# Altium PCB speedometer_PCB_layout.PcbDoc
Units mm, origin at the board's own origin, x right, y up, seen from the top; angles counter-clockwise.
Board outline 95 x 60 mm, 2 copper layers (Top Layer, Bottom Layer); 10 components, 20 nets, 88 pads, 2 vias.
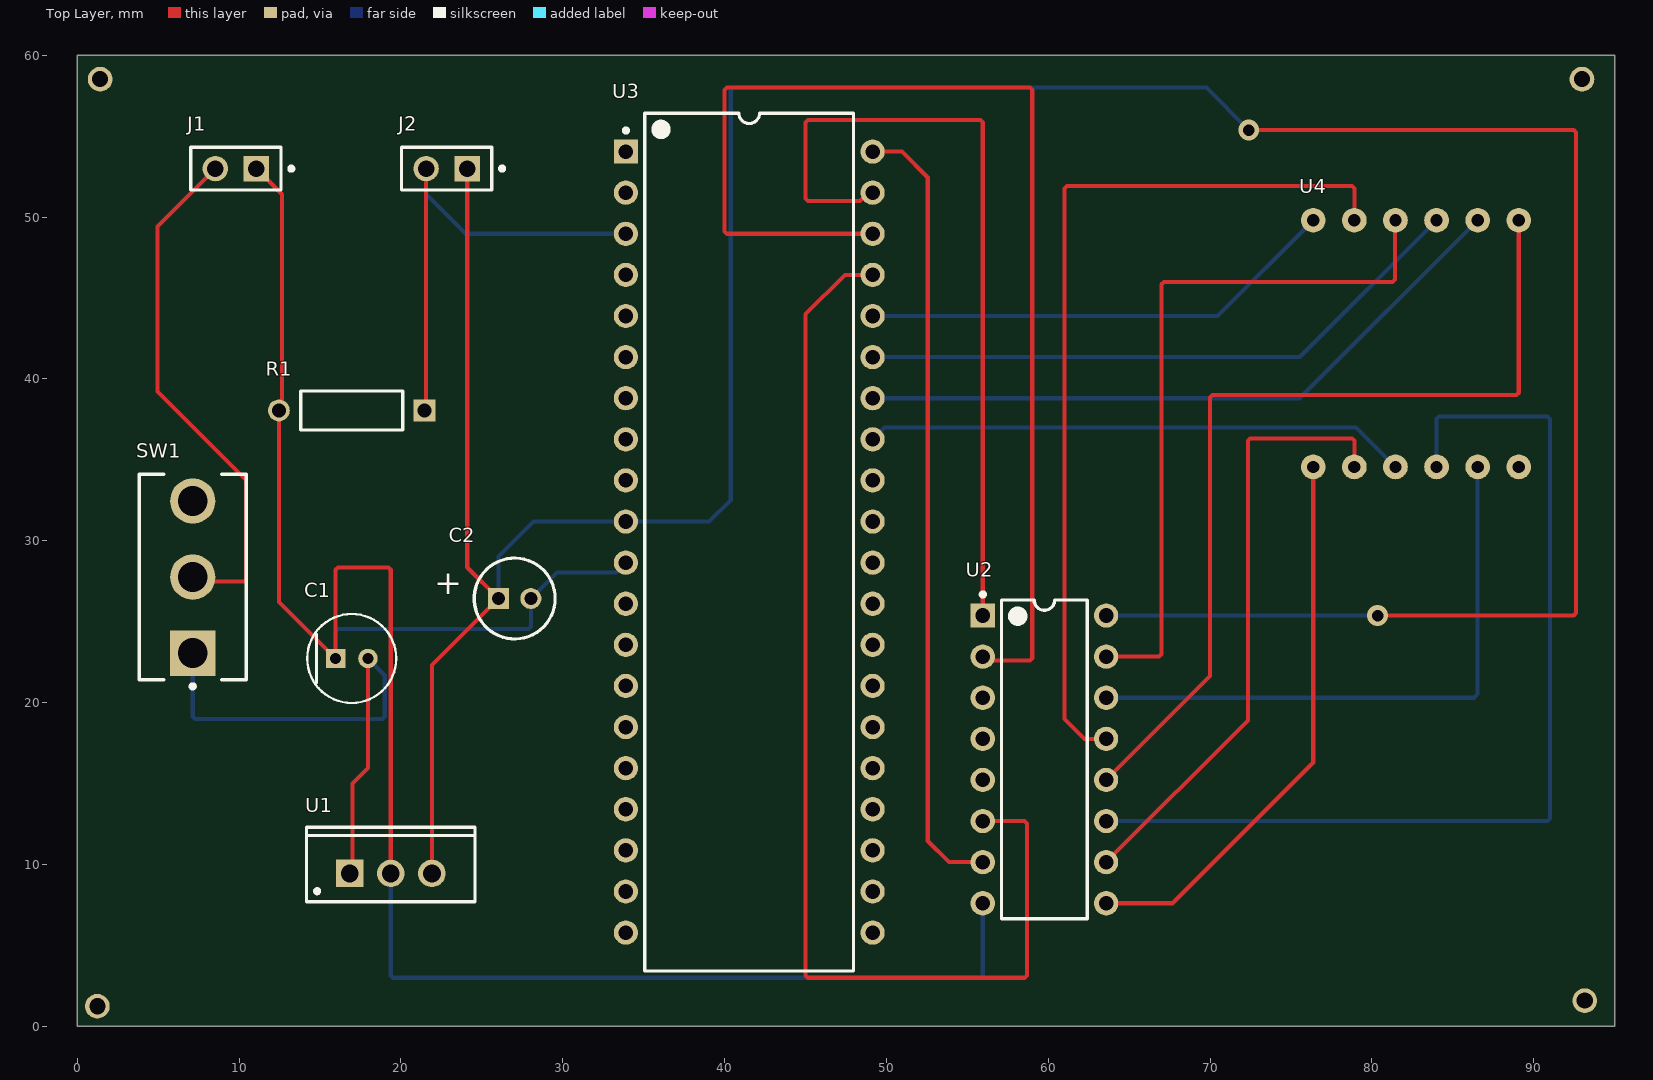
[diagram p0: Top Layer view]
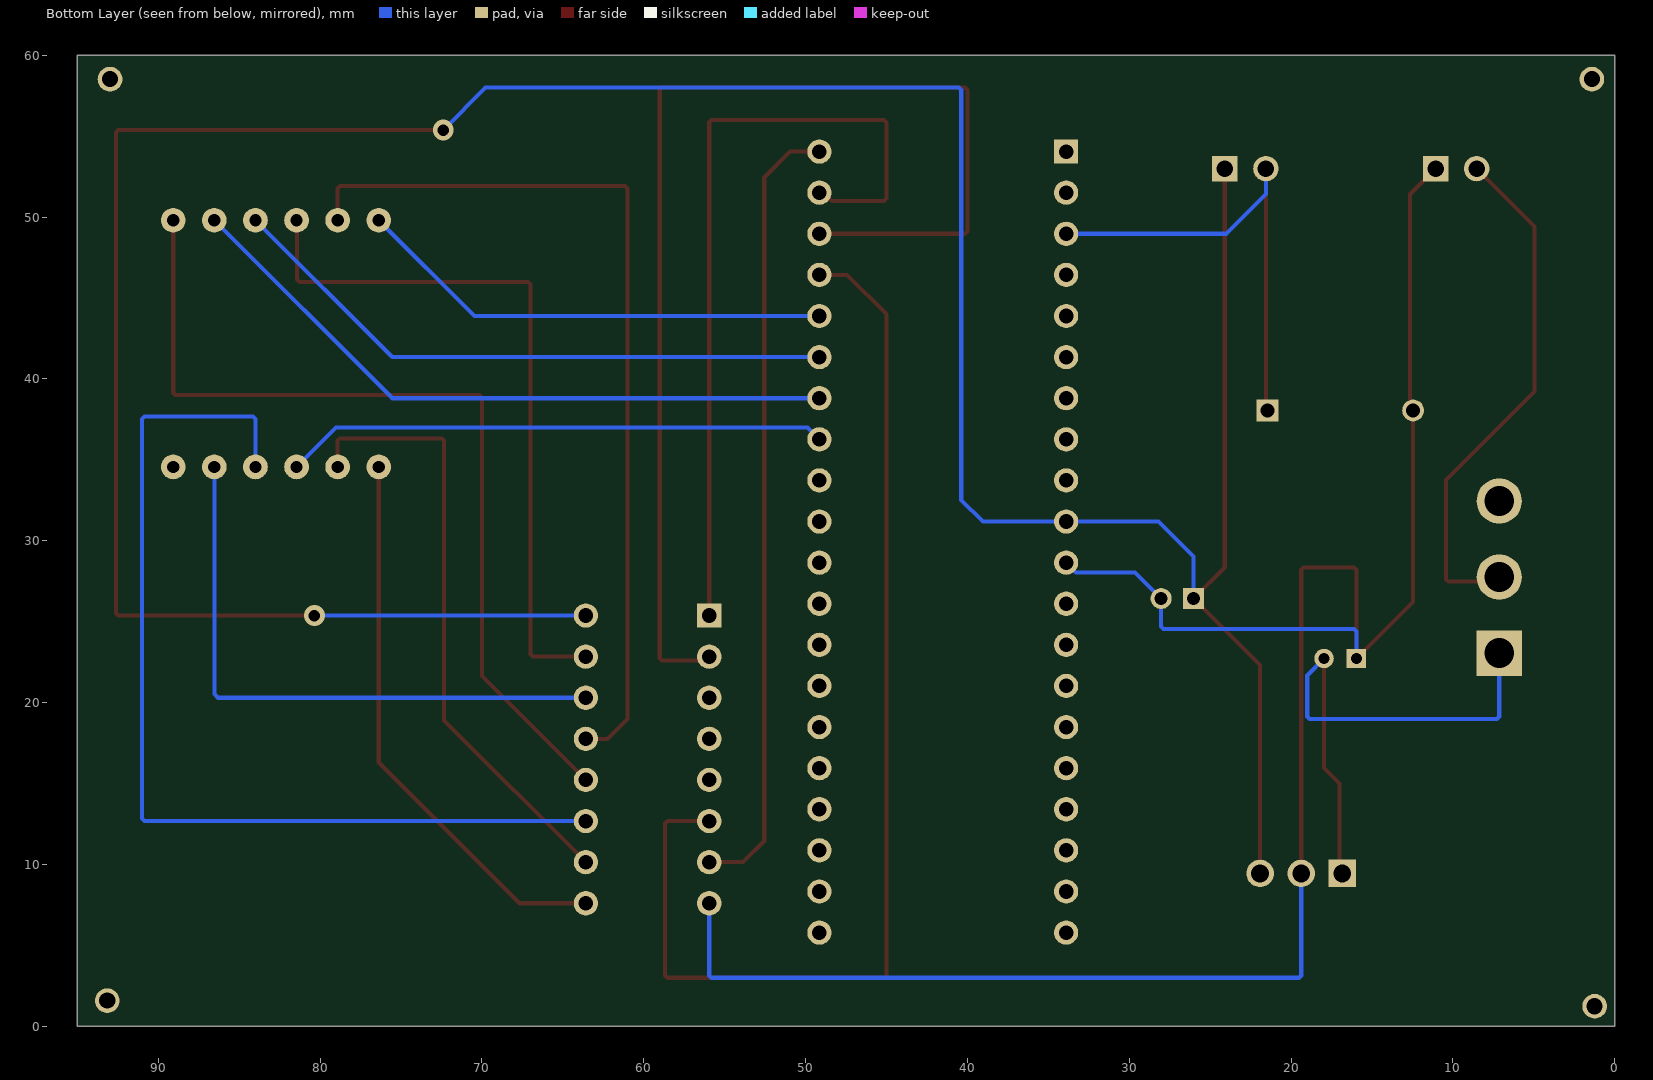
[diagram p1: Bottom Layer view, seen from below]

## Layer stack, top to bottom
Top Solder: solder mask 0.0102, Solder Resist, Dk 3.5
Top Layer: signal copper 0.0356
Dielectric 1: dielectric 0.32, FR-4, Dk 4.8
Bottom Layer: signal copper 0.0356
Bottom Solder: solder mask 0.0102, Solder Resist, Dk 3.5

## Board outline
0,0 95,0 95,60 0,60

## Design rules (kind name [scope] priority, off if disabled: settings)
Clearance [All] p1: gap=0.254 ignorepadtopadclearanceinfootprint=FALSE except(0: Arc-Hole Track-Hole SMDPad-Hole THPad-Hole Via-Hole Fill-Hole Poly-Hole Region-Hole Text-Hole)
PolygonConnect [All] p1: connectstyle=Relief reliefconductorwidth=0.254 reliefentries=4 polygonreliefangle="90 Angle" airgapwidth=0.254
RoutingVias [All] p1: holewidth=0.711 width=1.27 viastyle="Through Hole" minholewidth=0.711 minwidth=1.27 maxholewidth=0.711 maxwidth=1.27
SolderMaskExpansion [All] p1: expansion=0.102 istentingtop=FALSE
Width [All] p1: maxlimit=0.254 minlimit=0.254 preferedwidth=0.254
30 further rules are at their usual default settings.

## Components (designator, comment, footprint, x,y, rotation, side; value= is the part's Value field where it differs from the comment)
C1 "ECA2AM100" FP-RAD-TH-D_5_0_5-L_11_1-MFG 16.959,22.728 r0 top
C2 "1uF" CAPPR55-200-1100X500X1200 27.026,26.432 r0 top
J1 "M20-9990246" FP-M20-9990246-MFG 9.8,52.995 r180 top
J2 "M20-9990246" FP-M20-9990246-MFG 22.826,52.995 r180 top
R1 "MFR-25FBF52-1K" RESA60-630X240 16.959,38.053 r180 top
SW1 "1101M2S3CQE2" FP-1101M2S3CQE2-MFG 7.134,27.756 r90 top
U1 "L7805CV" TO220 19.371,9.447 r0 top
U2 "SN74LS47N" N0016A 59.762,16.492 r0 top
U3 "ATmega32A-PU" 40P6 41.521,29.92 r0 top
U4 "4-Digit 7SD" "4-Digit 7SD" 76.371,34.562 r0 top

## Footprints (in the part's own frame and the unit in brackets; to place one, negate y for a bottom-side part, rotate by r counter-clockwise, add the part's x,y. Pads: shape width x height; smd on the part's side, far side on the other; paste and mask are expansions set on the pad)
"4-Digit 7SD" [mil]
  round 60 hole 30: 1(0,0) 2(100,0) 3(200,0) 4(300,0) 5(400,0) 6(500,0) 7(500,600) 8(400,600) 9(300,600) 10(200,600) 11(100,600) 12(0,600)
40P6 [mm] "40-Pin Ceramic Dual In-Line Package (CerDIP)"
  rect 1.5x1.5 hole 0.9: 1(-7.62,24.13)
  round 1.5 hole 0.9: 2(-7.62,21.59) 3(-7.62,19.05) 4(-7.62,16.51) 5(-7.62,13.97) 6(-7.62,11.43) 7(-7.62,8.89) 8(-7.62,6.35) 9(-7.62,3.81) 10(-7.62,1.27) 11(-7.62,-1.27) 12(-7.62,-3.81) 13(-7.62,-6.35) 14(-7.62,-8.89) 15(-7.62,-11.43) 16(-7.62,-13.97) 17(-7.62,-16.51) 18(-7.62,-19.05) 19(-7.62,-21.59) 20(-7.62,-24.13) 21(7.62,-24.13) 22(7.62,-21.59) 23(7.62,-19.05) 24(7.62,-16.51) 25(7.62,-13.97) 26(7.62,-11.43) 27(7.62,-8.89) 28(7.62,-6.35) 29(7.62,-3.81) 30(7.62,-1.27) 31(7.62,1.27) 32(7.62,3.81) 33(7.62,6.35) 34(7.62,8.89) 35(7.62,11.43) 36(7.62,13.97) 37(7.62,16.51) 38(7.62,19.05) 39(7.62,21.59) 40(7.62,24.13)
  silkscreen extent -7.74,-26.5 6.45,26.5, body extent -7.05,-26.47 7.05,26.47, height 5.72
CAPPR55-200-1100X500X1200 [mm] "THD, 2-Leads, Dia 5mm, Body Length 11mm"
  rect 1.3x1.3 hole 0.8: 1(-1,0)
  round 1.3 hole 0.8: 2(1,0)
  silkscreen extent -2.5,-2.5 2.5,2.5, body extent -2.5,-2.5 2.5,2.5, height 12
FP-1101M2S3CQE2-MFG [mm]
  rect 2.8x2.8 hole 1.85 paste-1000 mask+0: 1(-4.7,0)
  round 2.8 hole 1.85 paste-1000 mask+0: 2(0,0) 3(4.7,0)
  silkscreen extent -6.87,-3.3 6.35,3.3, body extent -6.45,-3.4 6.45,3.4, height 0.25
FP-M20-9990246-MFG [mm]
  rect 1.57x1.57 hole 1.02 paste-1000 mask+0: 1(-1.27,0)
  round 1.57 hole 1.02 paste-1000 mask+0: 2(1.27,0)
  silkscreen extent -3.55,-1.32 2.79,1.32, body extent -2.89,-1.42 2.89,1.42, height 0.25
FP-RAD-TH-D_5_0_5-L_11_1-MFG [mm]
  rect 1.2x1.2 hole 0.7 paste-1000 mask+0: 1(-1,0)
  round 1.2 hole 0.7 paste-1000 mask+0: 2(1,0)
  silkscreen extent -2.75,-2.75 2.75,2.75, body extent -2.85,-2.85 2.85,2.85, height 0.25
N0016A [mm] "DIP, 16-Leads, Body 19.7x6.6mm, Pitch 2.54mm"
  rect 1.5x1.5 hole 0.9: 1(-3.81,8.89)
  round 1.5 hole 0.9: 2(-3.81,6.35) 3(-3.81,3.81) 4(-3.81,1.27) 5(-3.81,-1.27) 6(-3.81,-3.81) 7(-3.81,-6.35) 8(-3.81,-8.89) 9(3.81,-8.89) 10(3.81,-6.35) 11(3.81,-3.81) 12(3.81,-1.27) 13(3.81,1.27) 14(3.81,3.81) 15(3.81,6.35) 16(3.81,8.89)
  silkscreen extent -3.93,-9.85 2.65,10.31, body extent -3.95,-9.85 3.95,9.85, height 5.08
RESA60-630X240 [mm] "Axial Resistor, 2-Leads, Dia 2.4mm, Body Length 6.3mm"
  rect 1.35x1.35 hole 0.85: 1(-4.5,0)
  round 1.35 hole 0.85: 2(4.5,0)
  silkscreen extent -3.15,-1.2 3.15,1.2, body extent -3.15,-1.2 3.15,1.2, height 2.4
TO220 [mm] "TO, Thru-Hole, Vertical, Heatsink Mounted; 3 In-Line Leads; Pitch 2.54 mm"
  rect 1.7x1.7 hole 1.1: 1(-2.54,0)
  round 1.7 hole 1.1: 2(0,0) 3(2.54,0)
  silkscreen extent -5.2,-1.75 5.2,2.85, body extent -5.25,-1.8 5.25,2.9, height 19.7

## Part data
C1: library part CMP-05427-000869-1, "Aluminum Electrolytic Capacitors (Radial Lead Type) 10uF ±20% 100V", Capacitance=10uF, Case/Package=Radial, Dielectric Material=Aluminium, Leakage Current=3uA, Max Operating Temperature=85°C, Min Operating Temperature=-40°C, Package Quantity=200, Ripple Current=70mA, Tolerance=20%, Voltage=100V, Construction=RADIAL, Contact Plating=Tin, Diameter=5mm, Dissipation Factor=0.1%, Height=11mm, Height - Seated (Max)=0.472inch, Lead Diameter=0.5mm, Lead Free="Lead Free", Lead Pitch=2mm, Lead/Base Style=Straight, Length=11mm, Life (Hours)=2000Hour, Mount="Through Hole", Number of Pins=2, Packaging=Bulk, Polarity=Polar, Radiation Hardening=No, REACH SVHC="No SVHC", Ripple Current (AC)=70mA, RoHS Compliant=Yes, Series=M, Termination=Radial, Voltage Rating=100V, Voltage Rating (DC)=100V, Width=5mm
C2: library part CMP-1665-00039-1, "Aluminum Electrolytic Capacitor, 1 uF, +/- 20%, 50 V, -55 to 105 degC, 2-Pin THD, RoHS, Bulk", Max Operating Temperature="70 degC", Min Operating Temperature="-30 degC", Package Quantity=150, Channels=2, ComponentLink1Description="Manufacturer URL", ComponentLink1URL=http://www.panasonic.com/, ComponentLink2Description=Datasheet, ComponentLink2URL=https://datasheet.ciiva.com/7275/94060-7275472.pdf, DatasheetVersion=Mar-05, Mount="Through Hole", PackageDescription="2-Pin Radial Lead, Dia 5 mm, Body Length 11 mm", PackageReference=CAPPR55-200-1100X500X1200, Packaging=Bulk, Radiation Hardening=No, RoHSCompliant=true
J1 J2: library part CMP-15831-000009-1, "CONN HEADER VERT 2POS 2.54MM", Current Rating=3A, Manufacturer=Harwin, Temperature="-40°C to +105°C", Temperature Range High=+105°C, Temperature Range Low=-40°C, Automotive=No, Category=Conn, ComponentLink2Description=Datasheet, ComponentLink2URL=https://cdn.harwin.com/pdfs/M20-999.pdf, Conn Gender=Male, Conn Orientation=Vertical, Contact Material=Tin,Nickel, Device Class L1=Connectors, Device Class L2="Headers and Wire Housings", Device Class L3=unset, Digikey Description="CONN HEADER VERT 2POS 2.54MM", Height=8.99mm, Lead Free=Yes, Manufacturer Part Number=M20-9990246, Mouser Description="2.54mm (0.1\") Pitch SIL Vertical PC Tail Pin Header, 6.1mm mating pin height, tin, 2 contacts", Number Of Contacts=2, Number Of Rows=1, Octopart=https://octopart.com/m20-9990246-harwin-2590635, Package=M20-9990246, Pitch=2.54mm, RoHS=TRUE
R1: library part CMP-1659-00075-1, "Axial Resistor, 1 KOhm, +/- 1%, 250 mW, -55 to 155 degC, 2-Pin THD, RoHS, Bulk", Case\Package=Axial, Max Operating Temperature="155 degC", Min Operating Temperature="-55 degC", Package Quantity=200, Power Rating="250 mW", Resistance="10 kohm", Tolerance=1%, Voltage Rating="250 V", ComponentLink1Description="Manufacturer URL", ComponentLink1URL=http://www.yageo.com/, ComponentLink2Description=Datasheet, ComponentLink2URL=http://www.yageo.com/documents/recent/Yageo%20LR_MFR_2013.pdf, DatasheetVersion=Apr-13, Length="0.248 inch", PackageDescription="2-Pin Axial Lead, Dia 2.4 mm, Body Length 6.3 mm", PackageReference=MFR-25, Packaging=Bulk, RoHSCompliant=true
SW1: library part CMP-10038-000019-1, "SWITCH SLIDE SPDT 6A 120V", Actuator Color=Black, Contact Current Rating=6A, Contact Resistance=10mR, Flammability Rating="UL94 V-0", Insulation Resistance=1GR, Max Operating Temperature=65°C, Max Voltage Rating (AC)=250V, Max Voltage Rating (DC)=28V, Min Operating Temperature=-30°C, Package Quantity=1, Voltage Rating (AC)=120V, Actuator Length=5.08mm, Actuator Material=Nylon, Actuator Type=Standard, Approvals=UL, Body Material="Stainless Steel", Contact Material=Copper, Contact Plating=Silver, Current Rating=6A, Depth=6.6mm, Electrical Life=40000Cycles, Housing Material="Stainless Steel", Lead Free="Lead Free", Length=12.7mm, Max Current Rating=6A, Mount="Through Hole", Number of Poles=1, Number of Positions=3, Orientation=Vertical, Packaging=Bulk, REACH SVHC="No SVHC", Series=1000, Switch Function=On-On, Switch Travel=2.16mm, Termination="PC Pins", Throw Configuration=SPDT, Voltage Rating (DC)=28V
U1: library part CMP-0244-00483-1, "Positive Voltage Regulator, 5V, 3-Pin TO-220", ComponentLink1Description="Manufacturer URL", ComponentLink1URL=http://www.st.com, ComponentLink2Description=Datasheet, ComponentLink2URL=http://www.st.com/internet/com/TECHNICAL_RESOURCES/TECHNICAL_LITERATURE/DATASHEET/CD00000444.pdf, ComponentLink3Description="Package Specification", ComponentLink3URL=http://www.st.com/internet/com/TECHNICAL_RESOURCES/TECHNICAL_LITERATURE/PACKAGE_INFORMATION/CD00004649.pdf, DatasheetVersion=16/11/2011, PackageDescription="TO, Thru-Hole, Vertical, Heatsink Mounted; 3 In-Line Leads; Pitch 2.54 mm", PackageReference=TO220, PackageVersion=ver3.0
U2: library part CMP-0388-00303-2, "BCD-to-7-Segment Decoder / Driver, 4.75 to 5.25 V, 0 to 70 degC, 16-pin DIP (N16), Pb-Free (RoHS)", Manufacturer="Texas Instruments", Rating=Catalog, Code_JEDEC=MS-001, ComponentLink1Description="Manufacturer URL", ComponentLink1URL=http://www.ti.com/, ComponentLink2Description=Datasheet, ComponentLink2URL=http://www.ti.com/general/docs/lit/getliterature.tsp?genericPartNumber=SN74LS47&fileType=pdf, ComponentLink3Description="Package Specification", ComponentLink3URL=http://www.ti.com/litv/pdf/mpdi002c, DatasheetVersion=SDLS111, Eco-Plan="Pb-Free (RoHS)", Mounting Technology="Through Hole", PackageDescription="16-Pin Plastic In-Line, Body 19.305 x 6.35 mm, Pitch 2.54 mm", PackageReference=N0016A, PackageVersion=4040049/E, PartNumber=SN74LS47N, SubFamily="Discrete Segment LED Driver", Vin(Max)(V)=5.25, Vin(Min)(V)=4.75
U3: library part CMP-0095-00028-2, "8-bit AVR Microcontroller, 2.7-5.5V, 16MHz, 32KB Flash, 1KB EEPROM, 2KB SRAM, 40-pin PDIP, Industrial Grade (-40°C to 85°C)", Code_JEDEC=MS-011-AC, ComponentLink1Description="Manufacturer URL", ComponentLink1URL=http://www.atmel.com/, ComponentLink2Description="ATmega32A Datasheet", ComponentLink2URL=http://www.atmel.com/dyn/resources/prod_documents/doc8155.pdf, ComponentLink3Description="ATmega32A Summary", ComponentLink3URL=http://www.atmel.com/dyn/resources/prod_documents/8155S.pdf, DatasheetVersion="revC, Feb-2011", PackageDescription="40-lead (0.600\"/15.24mm Wide) Plastic Dual Inline Package (PDIP)", PackageReference=40P6, PackageVersion="revB, Sep-2001", RevisionNote="DatasheetVersion updated. URLs added."

## Free pads (board coordinates)
  round 1.524 hole 1: 2(1.411,58.525) 3(92.976,58.525) 4(93.147,1.586) 5(1.24,1.244)

## Via types
v1: diameter 1.27, hole 0.711, Top Layer to Bottom Layer, 2 vias

## Nets (pads, with @x,y where several pads share a name; then routed paths per layer and width w, separated by ;. In a path a pad name is that pad's centre, name@x,y a point inside that pad or via, vN(x,y) a via of type N, cw(c..) or ccw(c..) an arc to the next point about the centre after c; other vN are vias at no path point)
NetC1_1: C1.1 C2.2 J1.1 R1.2 U1.2 U2.8 U3.11 | length 130.1
  Top Layer w0.254: J1.1 12.651,51.414 12.651,38.246 R1.2 12.459,26.228 C1.1 15.959,28.21 16.107,28.358 19.222,28.358 19.371,28.21 U1.2
  Bottom Layer w0.254: C1.1 15.959,24.399 16.107,24.548 27.877,24.548 28.026,24.697 C2.2 29.636,28.042 33.293,28.042 U3.11 ; U1.2 19.371,3.149 19.52,3 55.803,3 55.952,3.149 U2.8
NetC1_2: C1.2 SW1.1 U1.1 | length 33.7
  Top Layer w0.254: U1.1 17,9.616 17,15 17.959,15.959 C1.2
  Bottom Layer w0.254: SW1.1 7.134,19.149 7.282,19 18.851,19 19,19.149 19,21.687 C1.2
NetC2_1: C2.1 J2.1 U1.3 U2.16 U3.10 | length 202
  Top Layer w0.254: U1.3 21.911,22.317 C2.1 24.096,28.362 J2.1 ; v1(72.382,55.382) 92.469,55.382 92.618,55.233 92.618,25.531 92.469,25.382 v1(80.343,25.382)
  Bottom Layer w0.254: C2.1 26.026,29.026 28.19,31.19 U3.10 ; U3.10@33.921,31.19 39.041,31.19 40.382,32.531 40.382,57.851 40.531,58 69.764,58 v1(72.382,55.382) ; U2.16 v1(80.343,25.382)
NetJ1_2: J1.2 SW1.2 | length 32.6
  Top Layer w0.254: SW1.2 7.417,27.473 10.269,27.473 10.418,27.622 10.418,33.767 4.952,39.233 4.952,49.418 J1.2
NetJ2_2: J2.2 R1.1 U3.3 | length 29.9
  Top Layer w0.254: R1.1 21.556,38.151 J2.2
  Bottom Layer w0.254: J2.2 21.556,51.42 24.006,48.97 U3.3
NetU2_1: U2.1 U3.39 | length 50.7
  Top Layer w0.254: U3.39 48.879,51.51 48.369,51 45.149,51 45,51.149 45,55.851 45.149,56 55.803,56 55.952,55.851 U2.1
NetU2_2: U2.2 U3.38 | length 75.4
  Top Layer w0.254: U3.38 40.149,48.97 40,49.119 40,57.851 40.149,58 58.863,58 59.012,57.851 59.012,22.745 58.863,22.596 56.724,22.596 56.716,22.604 56.19,22.604 U2.2
NetU2_6: U2.6 U3.37 | length 72
  Top Layer w0.254: U3.37 47.43,46.43 45,44 45,3.149 45.149,3 58.525,3 58.674,3.149 58.674,12.533 58.525,12.682 U2.6
NetU2_7: U2.7 U3.40 | length 49
  Top Layer w0.254: U3.40 50.95,54.05 52.553,52.447 52.553,11.447 53.858,10.142 U2.7
NetU2_9: U2.9 U4.1 | length 34.7
  Top Layer w0.254: U2.9 67.681,7.602 76.371,16.292 U4.1
NetU2_10: U2.10 U4.2 | length 38
  Top Layer w0.254: U2.10 72.333,18.902 72.333,36.184 72.481,36.333 78.762,36.333 78.911,36.184 U4.2
NetU2_11: U2.11 U4.4 | length 62.3
  Bottom Layer w0.254: U2.11 90.851,12.682 91,12.831 91,37.533 90.851,37.682 84.14,37.682 83.991,37.533 U4.4
NetU2_12: U2.12 U4.7 | length 56.1
  Top Layer w0.254: U2.12 70,21.65 70,38.851 70.149,39 88.922,39 89.071,39.149 U4.7
NetU2_13: U2.13 U4.11 | length 55.8
  Top Layer w0.254: U2.13 62.238,17.762 61,19 61,51.762 61.149,51.911 78.762,51.911 78.911,51.762 U4.11
NetU2_14: U2.14 U4.5 | length 37.1
  Bottom Layer w0.254: U2.14 86.302,20.302 86.531,20.531 U4.5
NetU2_15: U2.15 U4.10 | length 44.6
  Top Layer w0.254: U2.15 66.851,22.842 67,22.991 67,45.851 67.149,46 81.27,46 81.419,46.149 81.419,49.77 U4.10
NetU3_33: U3.33 U4.3 | length 33.6
  Bottom Layer w0.254: U3.33 49.871,37 79.014,37 U4.3
NetU3_34: U3.34 U4.8 | length 41.9
  Bottom Layer w0.254: U3.34 75.539,38.81 U4.8
NetU3_35: U3.35 U4.9 | length 38.4
  Bottom Layer w0.254: U3.35 75.539,41.35 U4.9
NetU3_36: U3.36 U4.12 | length 29.7
  Bottom Layer w0.254: U3.36 70.459,43.89 U4.12
pads on no net: SW1.3 U2.3 U2.4 U2.5 U3.1 U3.2 U3.4 U3.5 U3.6 U3.7 U3.8 U3.9 U3.12 U3.13 U3.14 U3.15 U3.16 U3.17 U3.18 U3.19 U3.20 U3.21 U3.22 U3.23 U3.24 U3.25 U3.26 U3.27 U3.28 U3.29 U3.30 U3.31 U3.32 U4.6

## Text inside footprints (layer, text, board x,y; h text height)
C2: Top Overlay "+" at 22.067,26.687 h1.5